# EAGLE board board (EAGLE 4.16)
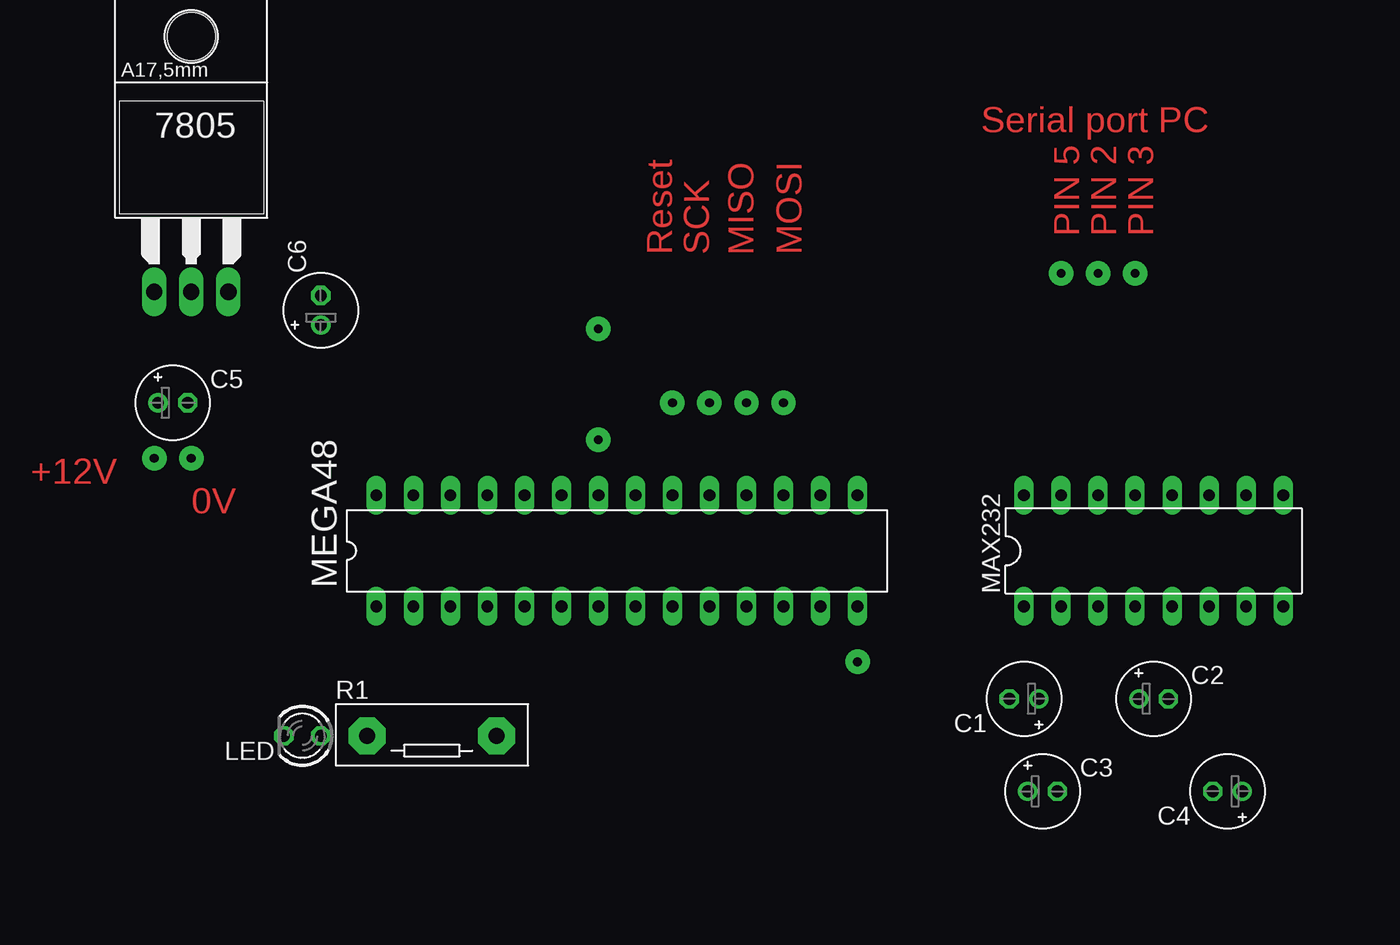
[diagram p0: board, top side]
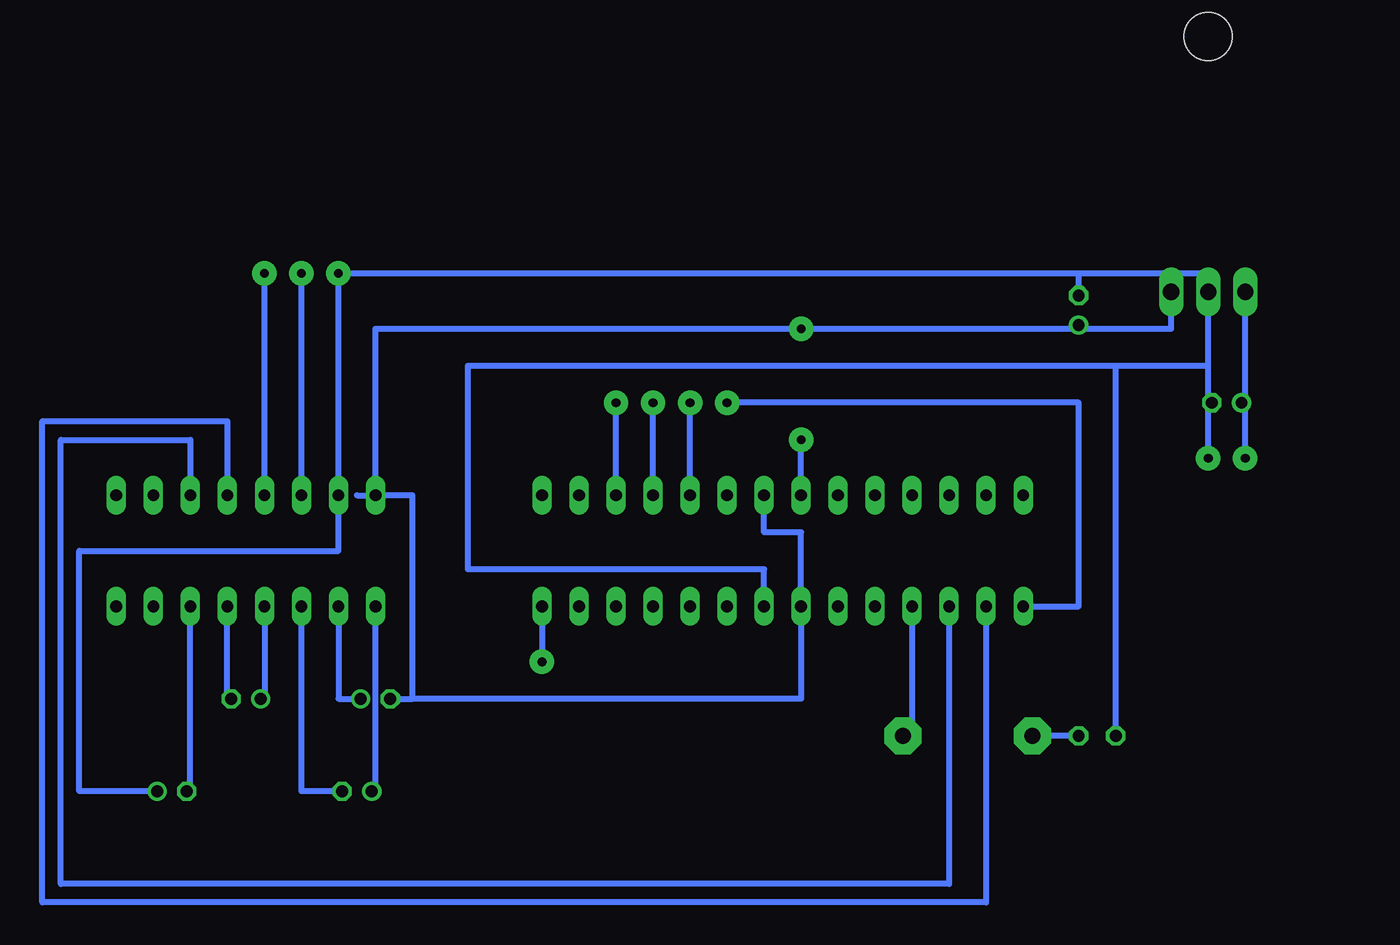
[diagram p1: board, bottom side, seen from below]

No outline drawn. Coordinates in mm, seen from the top.
Copper layers (1*16): Top 0.035mm / dielectric 1.5mm / Bottom 0.035mm
Design rules "default": minimum track width 10mil, minimum drill 24mil, track to track 8mil, track to pad 8mil, pad to pad 8mil, via to via 8mil, smd to smd 8mil, copper to edge 40mil, drill to drill 8mil, minimum pad ring 10mil, minimum via ring 8mil, stop-mask expansion 4mil, vias tented up to drill 0mil, thermal gap 10mil

## Footprints (pad centres in the part's own frame; a part is rotated, then mirrored left to right if it is on the bottom)
C221A4 = drill 1.118 long: A1 -2.54,-6.35; A2 2.54,-6.35; C 0,-6.35 | hole 3.302: 0,11.176
E2-5 = drill 0.813 pad 1.27 round: + -1.016,0 | drill 0.813 pad 1.27 octagon: - 1.016,0
LED3MM = drill 0.813 octagon: A -1.27,0; K 1.27,0
DIL16 = drill 0.813 long: 1 -8.89,-3.81; 2 -6.35,-3.81; 3 -3.81,-3.81; 4 -1.27,-3.81; 5 1.27,-3.81; 6 3.81,-3.81; 7 6.35,-3.81; 8 8.89,-3.81; 9 8.89,3.81; 10 6.35,3.81; 11 3.81,3.81; 12 1.27,3.81; 13 -1.27,3.81; 14 -3.81,3.81; 15 -6.35,3.81; 16 -8.89,3.81
DIL28-3 = drill 0.813 long: 1 -16.51,-3.81; 2 -13.97,-3.81; 3 -11.43,-3.81; 4 -8.89,-3.81; 5 -6.35,-3.81; 6 -3.81,-3.81; 7 -1.27,-3.81; 8 1.27,-3.81; 9 3.81,-3.81; 10 6.35,-3.81; 11 8.89,-3.81; 12 11.43,-3.81; 13 13.97,-3.81; 14 16.51,-3.81; 15 16.51,3.81; 16 13.97,3.81; 17 11.43,3.81; 18 8.89,3.81; 19 6.35,3.81; 20 3.81,3.81; 21 1.27,3.81; 22 -1.27,3.81; 23 -3.81,3.81; 24 -6.35,3.81; 25 -8.89,3.81; 26 -11.43,3.81; 27 -13.97,3.81; 28 -16.51,3.81
MPC70-2 = drill 1.118 pad 2.54 octagon: 1 -4.445,0; 2 4.445,0

## Placement (x,y rotation side)
7805  [C221A4]  3.81,77.47 0 top
C1  [E2-5]  60.96,43.18 180 top
C2  [E2-5]  69.85,43.18 0 top
C3  [E2-5]  62.23,36.83 0 top
C4  [E2-5]  74.93,36.83 180 top
C5  [E2-5]  2.54,63.5 0 top
C6  [E2-5]  12.7,69.85 90 top
LED  [LED3MM]  11.43,40.64 180 top
MAX232  [DIL16]  69.85,53.34 0 top
MEGA48  [DIL28-3]  33.02,53.34 0 top
R1  [MPC70-2]  20.32,40.64 0 top

## Library data of the parts
7805 = diode
C1-C6 = rcl
LED = led
MAX232 = 74ac-logic
MEGA48 = atmel
R1 = resistor-power

## Nets
S$1: MAX232.2
S$2: LED.A
S$3: 7805.A2 MEGA48.7 MEGA48.21
S$4: MAX232.1
S$5: MAX232.3
S$6: MAX232.4
S$7: MAX232.5
S$8: MAX232.6
S$9: MEGA48.4
S$10: MEGA48.17
S$11: MEGA48.18
S$12: MEGA48.19
S$13: MEGA48.1
S$14: 7805.A1
S$15: 7805.C LED.K MAX232.15 MEGA48.8
S$16: MAX232.12 MEGA48.2
S$17: MAX232.11 MEGA48.3
S$18: MAX232.14
S$19: MAX232.13
S$21: MEGA48.22
S$23: MEGA48.14

## Tracks (layer width: path | path; a pad name or v marks a point on that pad's centre or on a via)
S$1
  Bottom 0.406: MAX232.2 63.5,43.18 62.23,43.18
S$2
  Bottom 0.406: LED.A 15.24,40.64
S$3
  Bottom 0.406: 59.69,43.18 58.42,43.18 | 58.42,43.18 58.42,57.15 60.96,57.15 | 62.23,57.15 60.96,57.15 | 60.96,57.15 60.96,68.58 6.35,68.58 7805.A2 | 58.42,43.18 31.75,43.18 MEGA48.7 31.75,54.61 34.29,54.61 MEGA48.21
S$4
  Bottom 0.406: 60.96,36.83 MAX232.1
S$5
  Bottom 0.406: 63.5,36.83 66.04,36.83 MAX232.3
S$6
  Bottom 0.406: MAX232.4 68.58,43.18
S$7
  Bottom 0.406: 71.12,43.18 MAX232.5
S$8
  Bottom 0.406: 73.66,36.83 MAX232.6
S$9
  Bottom 0.406: MEGA48.4 24.13,40.64 25.4,40.64
S$10  (via drill 0.6 pad 1.68)
  Bottom 0.406: MEGA48.17 v44.45,63.5
S$11  (via drill 0.6 pad 1.68)
  Bottom 0.406: MEGA48.18 v41.91,63.5
S$12  (via drill 0.6 pad 1.68)
  Bottom 0.406: MEGA48.19 v39.37,63.5
S$13  (via drill 0.6 pad 1.68)
  Bottom 0.406: MEGA48.1 12.7,49.53 12.7,63.5 v36.83,63.5
S$14  (via drill 0.6 pad 1.68)
  Bottom 0.406: v1.27,59.69 7805.A1
S$15  (via drill 0.6 pad 1.68)
  Bottom 0.406: MEGA48.8 34.29,52.07 54.61,52.07 54.61,66.04 10.16,66.04 | 10.16,66.04 3.81,66.04 3.81,67.31 | 76.2,36.83 81.28,36.83 81.28,53.34 63.5,53.34 63.5,58.42 | MAX232.15 63.5,58.42 | 63.5,58.42 v63.5,72.39 12.7,72.39 | 12.7,72.39 3.81,72.39 7805.C 3.81,67.31 | LED.K 10.16,66.04 | 12.7,71.12 12.7,72.39 | v3.81,59.69 3.81,67.31
S$16
  Bottom 0.406: MEGA48.2 19.05,29.21 83.82,29.21 83.82,62.23 71.12,62.23 MAX232.12
S$17
  Bottom 0.406: MEGA48.3 21.59,30.48 82.55,30.48 82.55,60.96 73.66,60.96 MAX232.11
S$18  (via drill 0.6 pad 1.68)
  Bottom 0.406: MAX232.14 v66.04,72.39
S$19  (via drill 0.6 pad 1.68)
  Bottom 0.406: MAX232.13 v68.58,72.39
S$21  (via drill 0.6 pad 1.68)
  Bottom 0.406: MEGA48.22 v31.75,60.96
S$22  (via drill 0.6 pad 1.68)
  other vias: 31.75,68.58
S$23  (via drill 0.6 pad 1.68)
  Bottom 0.406: MEGA48.14 v49.53,45.72

## Text on the board
Top: Serial port PC | MISO | PIN 5 | PIN 2 | PIN 3 | Reset | SCK | MOSI | +12V | 0V